# Altium PCB 2364 Adapter.PcbDoc
Units mm, origin at the board's own origin, x right, y up, seen from the top; angles counter-clockwise.
Board outline 22.61 x 37.34 mm, 2 copper layers (Top Layer, Bottom Layer), stack 0.969 mm thick; 7 components, 27 nets, 62 pads, 1 vias.
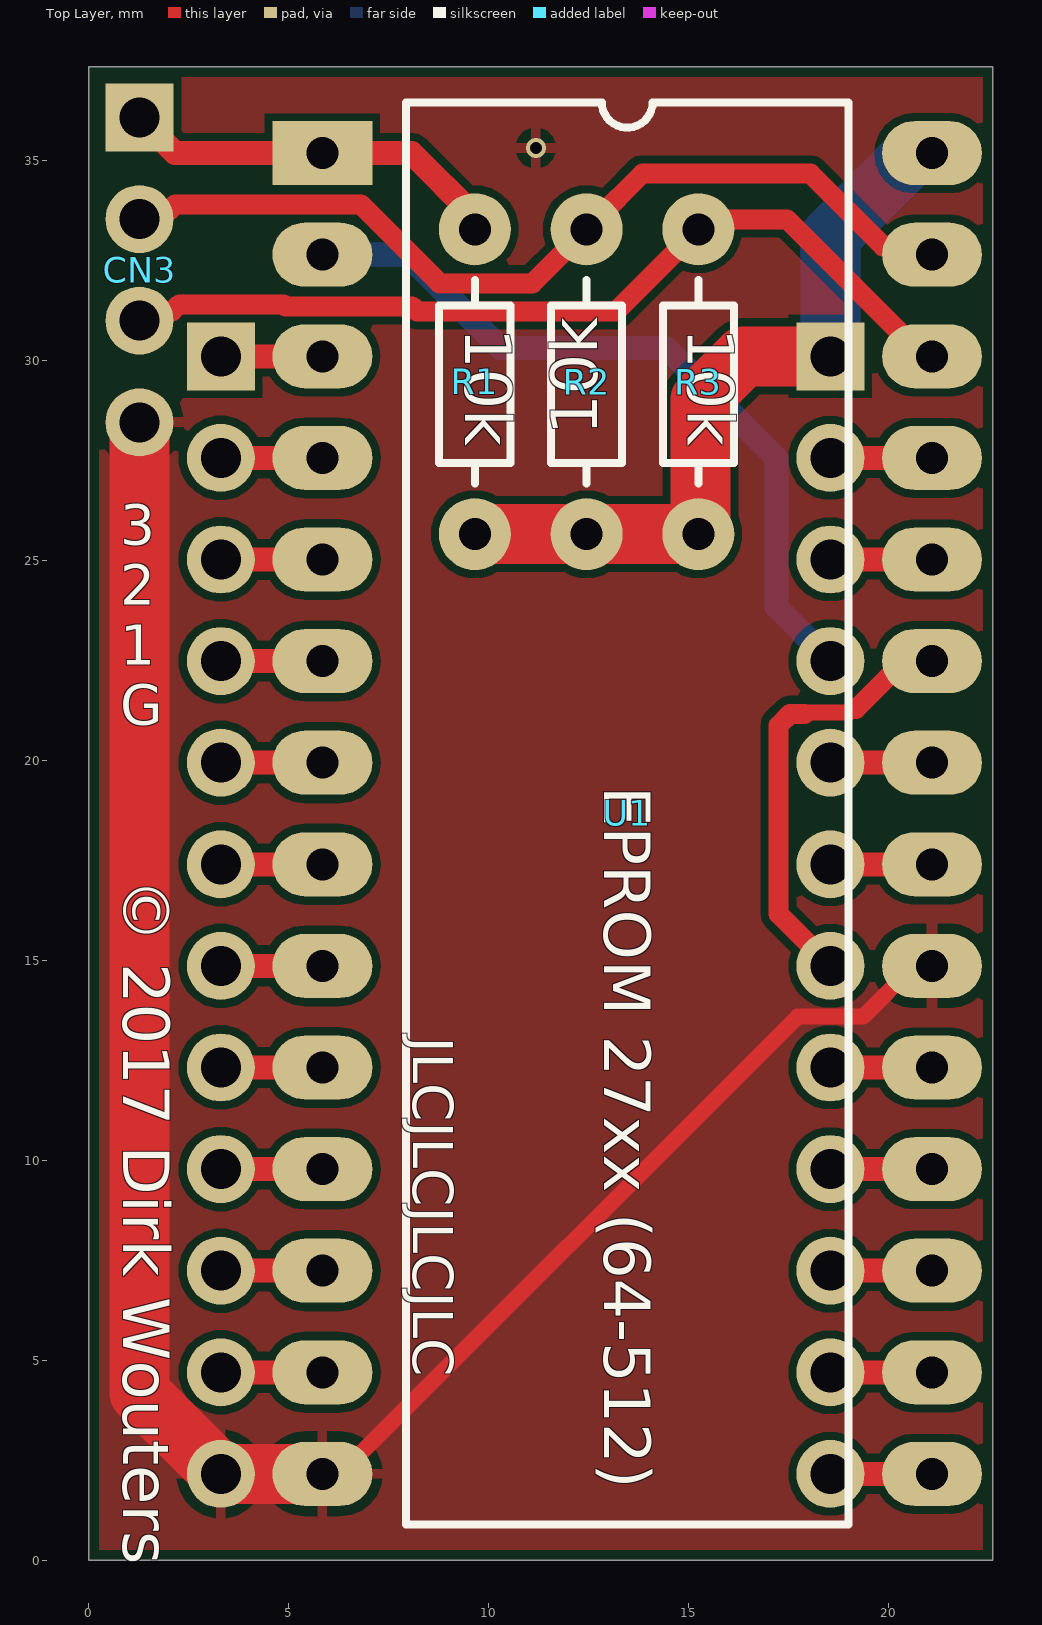
[diagram p0: Top Layer view]
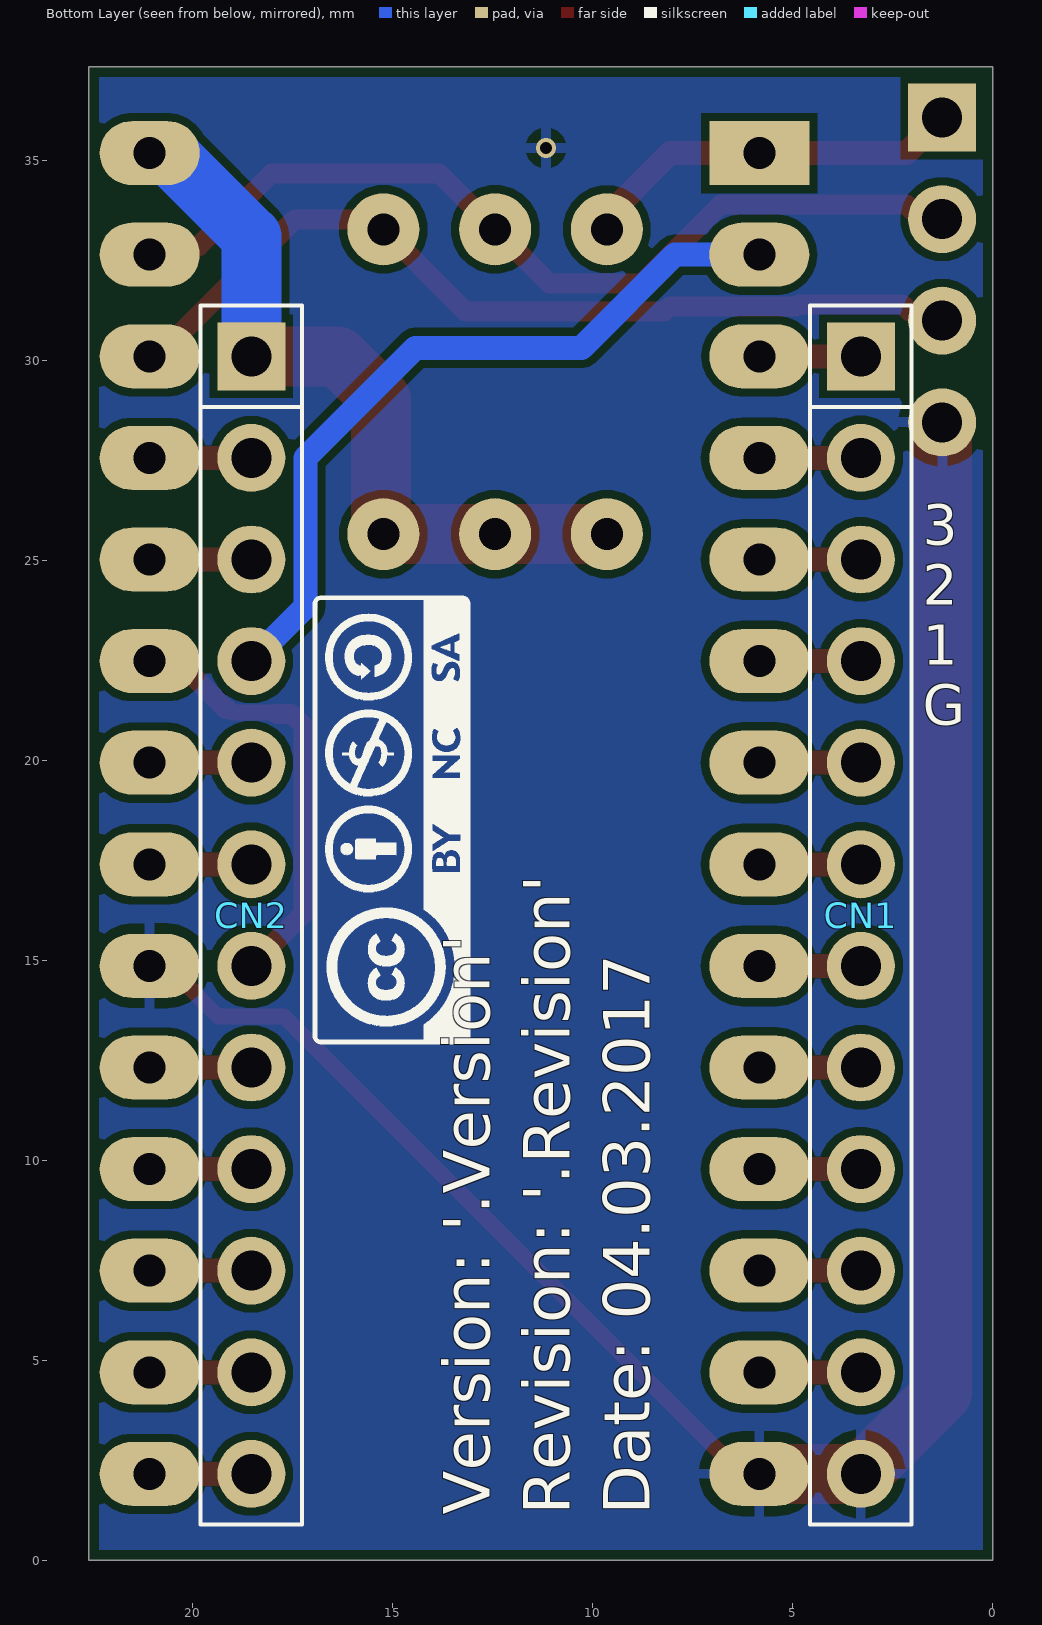
[diagram p1: Bottom Layer view, seen from below]
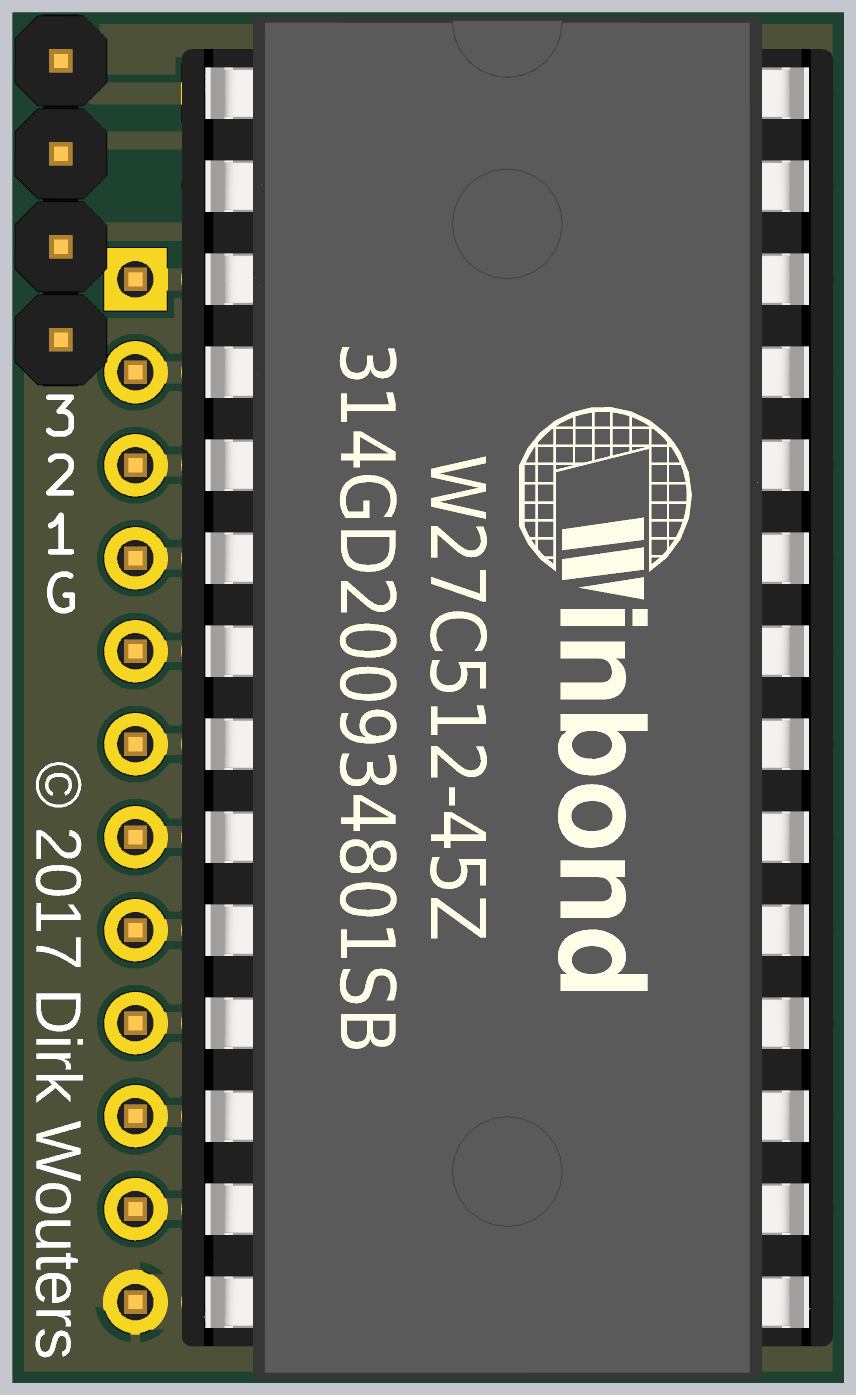
[diagram p2: 3D render of the assembled board from above, using the file's embedded part models]

## Layer stack, top to bottom
Top Solder: solder mask 0.0254, SM-001, Dk 4
Top Layer: signal copper 0.035
Dielectric 1: core 0.8986, Core-043, Dk 4.3
Bottom Layer: signal copper 0.035
Bottom Solder: solder mask 0.0254, SM-001, Dk 4

## Board outline
0,0 0,37.338 22.606,37.338 22.606,0

## Design rules (kind name [scope] priority, off if disabled: settings)
BoardOutlineClearance [All] p1: gap=0.254 ignorepadtopadclearanceinfootprint=FALSE
Clearance [All] p1: gap=0.2 ignorepadtopadclearanceinfootprint=TRUE
ComponentClearance ComponentClearance_Sheet [HasFootprint('PCB Title Block DIN A4')] p1: gap=0 collisioncheckmode=3 verticalgap=0 showdistances=FALSE
ComponentClearance [All] p2: gap=0 collisioncheckmode=3 verticalgap=0 showdistances=FALSE
MinimumSolderMaskSliver [All] p1: minsoldermaskwidth=0.103
PolygonConnect [All] p1: connectstyle=Relief reliefconductorwidth=0.254 reliefentries=4 polygonreliefangle="90 Angle" airgapwidth=0.254
RoutingVias RoutingVias_Power [(InNet('VCC') OR InNet('GND') OR InNet('+5V'))] p1: holewidth=0.8 width=1.5 viastyle="Through Hole" minholewidth=0.5 minwidth=1 maxholewidth=0.8 maxwidth=1.5
RoutingVias [All] p2: holewidth=0.4 width=0.7 viastyle="Through Hole" minholewidth=0.3 minwidth=0.6 maxholewidth=0.5 maxwidth=0.8
SilkToSilkClearance [All] p1: silktosilkclearance=0
SilkToSolderMaskClearance [IsPad] p1: minsilkscreentomaskgap=0 clearancetoexposedcopper=TRUE
SolderMaskExpansion [All] p1: expansion=0.038 istentingtop=FALSE
UnRoutedNet [All] p1: checkbadconnections=TRUE
Width Width_Power [(InNet('VCC') OR InNet('GND') OR InNet('+5V'))] p1: maxlimit=1.5 minlimit=0.4 preferedwidth=1.5
Width [All] p2: maxlimit=0.6 minlimit=0.3 preferedwidth=0.4
25 further rules are at their usual default settings.

## Components (designator, comment, footprint, x,y, rotation, side; value= is the part's Value field where it differs from the comment)
CN1 "2364 Socket left" "Pin Header 01x12 2.54mm Horizontal Male" 3.302,30.099 r270 bottom locked
CN2 "2364 Socket right" "Pin Header 01x12 2.54mm Horizontal Male" 18.542,30.099 r270 bottom locked
CN3 "Kernal Select" "Pin Header 01x04 2.54mm Horizontal Male" 1.27,36.068 r270 top
R1 "10k" "10 kOhm R Axial DIN0207 L6.3mm D2.5mm P7.62mm Horizontal" 9.652,33.274 r270 top
R2 "10k" "10 kOhm R Axial DIN0207 L6.3mm D2.5mm P7.62mm Horizontal" 12.446,33.274 r270 top
R3 "10k" "10 kOhm R Axial DIN0207 L6.3mm D2.5mm P7.62mm Horizontal" 15.24,33.274 r270 top
U1 "EPROM 27xx (64-512)" "Winbond W27C512-45Z DIP-28 with Socket" 5.842,35.179 r0 top locked

## Footprints (in the part's own frame and the unit in brackets; to place one, negate y for a bottom-side part, rotate by r counter-clockwise, add the part's x,y. Pads: shape width x height; smd on the part's side, far side on the other; paste and mask are expansions set on the pad)
"10 kOhm R Axial DIN0207 L6.3mm D2.5mm P7.62mm Horizontal" [mm]
  round 1.8 hole 0.8: 1(0,0) 2(7.62,0)
  silkscreen extent 1.27,-0.89 6.35,0.89, body extent -0.27,-1.14 7.9,1.14, height 2.44
"Pin Header 01x04 2.54mm Horizontal Male" [mm]
  rect 1.7x1.7 hole 1: 1(0,0)
  round 1.7 hole 1: 2(2.54,0) 3(5.08,0) 4(7.62,0)
  body extent -1.27,-1.27 8.89,1.27, height 8.34
"Pin Header 01x12 2.54mm Horizontal Male" [mm]
  rect 1.7x1.7 hole 1: 1(0,0)
  round 1.7 hole 1: 2(2.54,0) 3(5.08,0) 4(7.62,0) 5(10.16,0) 6(12.7,0) 7(15.24,0) 8(17.78,0) 9(20.32,0) 10(22.86,0) 11(25.4,0) 12(27.94,0)
  silkscreen extent -1.27,-1.27 29.21,1.27, body extent -1.27,-1.27 29.21,1.27, height 8.34
"Winbond W27C512-45Z DIP-28 with Socket" [mm]
  rect 2.5x1.6 hole 0.8: 1(0,0)
  oval 2.5x1.6 hole 0.8: 2(0,-2.54) 3(0,-5.08) 4(0,-7.62) 5(0,-10.16) 6(0,-12.7) 7(0,-15.24) 8(0,-17.78) 9(0,-20.32) 10(0,-22.86) 11(0,-25.4) 12(0,-27.94) 13(0,-30.48) 14(0,-33.02) 15(15.24,-33.02) 16(15.24,-30.48) 17(15.24,-27.94) 18(15.24,-25.4) 19(15.24,-22.86) 20(15.24,-20.32) 21(15.24,-17.78) 22(15.24,-15.24) 23(15.24,-12.7) 24(15.24,-10.16) 25(15.24,-7.62) 26(15.24,-5.08) 27(15.24,-2.54) 28(15.24,0)
  silkscreen extent 2.08,-34.29 13.16,1.27, body extent -1.27,-35.11 16.51,2.1, height 8.64

## Part data
CN1 CN2: library part CMP-Connectors-Male_PIN_Headers-00011-3, "CONN HEADER .100 SNGL STR 12POS", Color=Black, Package Quantity=1, Connector Type="Male Pin", Contact Mating Length=0.318inch, Contact Plating=Gold, Mount="Through Hole", Number of Positions=12, Number of Rows=1, Packaging=Bulk, Pitch=0.1inch, Termination=Solder
CN3: library part CMP-Connectors-Male_PIN_Headers-00003-3, "CONN HEADER .100\" SNGL STR 4POS", Color=Black, Package Quantity=1, Connector Type="Male Pin", Contact Mating Length=0.318inch, Contact Plating=Gold, Mount="Through Hole", Number of Positions=4, Number of Rows=1, Packaging=Bulk, Pitch=0.1inch, Termination=Solder
R1 R2 R3: library part CMP-Resistors-Yageo_THT_DIN_0207-00096-1, "RES 10K OHM 1/4W 5% AXIAL", Case/Package=Axial, Max Operating Temperature=155°C, Max Power Dissipation=250mW, Min Operating Temperature=-55°C, Package Quantity=200, Resistance=10kR, Temperature Coefficient=500ppm/°C, Tolerance=5%, Composition="Carbon Film", Lead Free="Lead Free", Length=0.248inch, Number of Terminations=2, Packaging=Bulk
U1: library part CMP-ICs-Memory-00001-2, "IC EEPROM 512KBIT 45NS 28DIP", Case/Package=DIP, Frequency=45GHz, Max Operating Temperature=70°C, Min Operating Temperature=0°C, Operating Supply Voltage=5V, Package Quantity=15, Access Time=45ns, Density=512Kb, Interface=Parallel, Lead Free="Lead Free", Memory Size=512000B, Memory Type=EEPROM, Number of Pins=28, Packaging=Rail/Tube, Radiation Hardening=No

## Via types
v1: diameter 0.5, hole 0.3, Top Layer to Bottom Layer, tented both sides, 1 vias

## Nets (pads, with @x,y where several pads share a name; then routed paths per layer and width w, separated by ;. In a path a pad name is that pad's centre, name@x,y a point inside that pad or via, vN(x,y) a via of type N, cw(c..) or ccw(c..) an arc to the next point about the centre after c; other vN are vias at no path point)
A0: CN1.8 U1.10 | length 2.5
  Top Layer w0.6: CN1.8 U1.10
A1: CN1.7 U1.9 | length 2.5
  Top Layer w0.6: CN1.7 U1.9
A2: CN1.6 U1.8 | length 2.5
  Top Layer w0.6: CN1.6 U1.8
A3: CN1.5 U1.7 | length 2.5
  Top Layer w0.6: CN1.5 U1.7
A4: CN1.4 U1.6 | length 2.5
  Top Layer w0.6: CN1.4 U1.6
A5: CN1.3 U1.5 | length 2.5
  Top Layer w0.6: CN1.3 U1.5
A6: CN1.2 U1.4 | length 2.5
  Top Layer w0.6: CN1.2 U1.4
A7: CN1.1 U1.3 | length 2.5
  Top Layer w0.6: CN1.1 U1.3
A8: CN2.2 U1.25 | length 2.5
  Top Layer w0.6: CN2.2 U1.25
A9: CN2.3 U1.24 | length 2.5
  Top Layer w0.6: CN2.3 U1.24
A10: CN2.6 U1.21 | length 2.5
  Top Layer w0.6: CN2.6 U1.21
A11: CN2.7 U1.23 | length 11.1
  Top Layer w0.4: 17.897,21.162 17.924,21.189 19.02,21.189 19.11,21.279 19.145,21.279
  Top Layer w0.5: 17.897,21.162 17.535,21.162 17.242,20.869 17.242,16.159 CN2.7 ; 19.145,21.279 19.18,21.279 20.38,22.479 U1.23
A12: CN2.4 U1.2 | length 19.1
  Bottom Layer w0.6: U1.2 7.954,32.639 10.282,30.311 14.436,30.311 17.192,27.556 17.192,23.829 CN2.4
A13: CN3.3 R3.1 U1.26 | length 22.4
  Top Layer w0.5: CN3.3 1.5,31.218 2.084,31.218 2.266,31.399 4.864,31.399 4.914,31.349 8.088,31.349 8.213,31.224 13.19,31.224 15.489,33.523 17.455,33.523 20.878,30.099 U1.26
A14: CN3.2 R2.1 U1.27 | length 22.8
  Top Layer w0.5: CN3.2 1.5,33.758 2.032,33.758 2.163,33.889 6.81,33.889 8.775,31.924 11.096,31.924 12.675,33.503 13.843,34.671 18.039,34.671 19.86,32.849 20.872,32.849 U1.27
A15: CN3.1 R1.1 U1.1 | length 9.7
  Top Layer w0.6: CN3.1 2.159,35.179 8.072,35.179 9.652,33.599 R1.1
CS: CN2.5 U1.22 | length 2.5
  Top Layer w0.6: CN2.5 U1.22
D0: CN1.9 U1.11 | length 2.5
  Top Layer w0.6: CN1.9 U1.11
D1: CN1.10 U1.12 | length 2.5
  Top Layer w0.6: CN1.10 U1.12
D2: CN1.11 U1.13 | length 2.5
  Top Layer w0.6: CN1.11 U1.13
D3: CN2.12 U1.15 | length 2.5
  Top Layer w0.6: CN2.12 U1.15
D4: CN2.11 U1.16 | length 2.5
  Top Layer w0.6: CN2.11 U1.16
D5: CN2.10 U1.17 | length 2.5
  Top Layer w0.6: CN2.10 U1.17
D6: CN2.9 U1.18 | length 2.5
  Top Layer w0.6: CN2.9 U1.18
D7: CN2.8 U1.19 | length 2.5
  Top Layer w0.6: CN2.8 U1.19
GND: CN1.12 CN3.4 U1.14 U1.20 | length 50.2
  Top Layer w0.4: U1.14 6.292,2.159 17.722,13.589 19.362,13.589 20.632,14.859 U1.20
  Top Layer w1.5: CN3.4 1.27,4.185 3.296,2.159 CN1.12 U1.14
  other v1: 11.176,35.306
VCC: CN2.1 R1.2 R2.2 R3.2 U1.28 | length 19.1
  Top Layer w1.5: R1.2 R2.2 R3.2 15.297,25.711 15.297,29.022 16.374,30.099 CN2.1
  Bottom Layer w1.5: CN2.1 18.542,33.089 20.632,35.179 U1.28

## Polygon pours and split planes (outlines as drawn)
GND on Top Layer "Top Layer - GND" (solid, remove dead copper, pour order 0): 0,0 0,37.338 22.606,37.338 22.606,0
GND on Bottom Layer "Bottom Layer - GND" (solid, remove dead copper, pour order 1): 0,0 0,37.338 22.606,37.338 22.606,0

## Silkscreen, mask and mechanical layers (free items; w line width, h text height)
Top Overlay:
  text "3 / 2 / 1 / G" at 0.787,20.887 h1
  text "© 2017 Dirk Wouters" at 0.481,17.034 h2 r270
  text "JLCJLCJLCJLC" at 8.113,13.093 h1 r270
Bottom Overlay:
  drawing of 13 lines, arcs and shapes, not listed
  text "3 / 2 / 1 / G" at 1.753,20.887 h1
  text "Version: '.Version' / Revision: '.Revision' / Date: 04.03.2017" at 8.189,1.143 h2 r270
Board:
  the board outline again, w0.1